# EAGLE board tritiled2x_programmer (EAGLE 8.2.2)
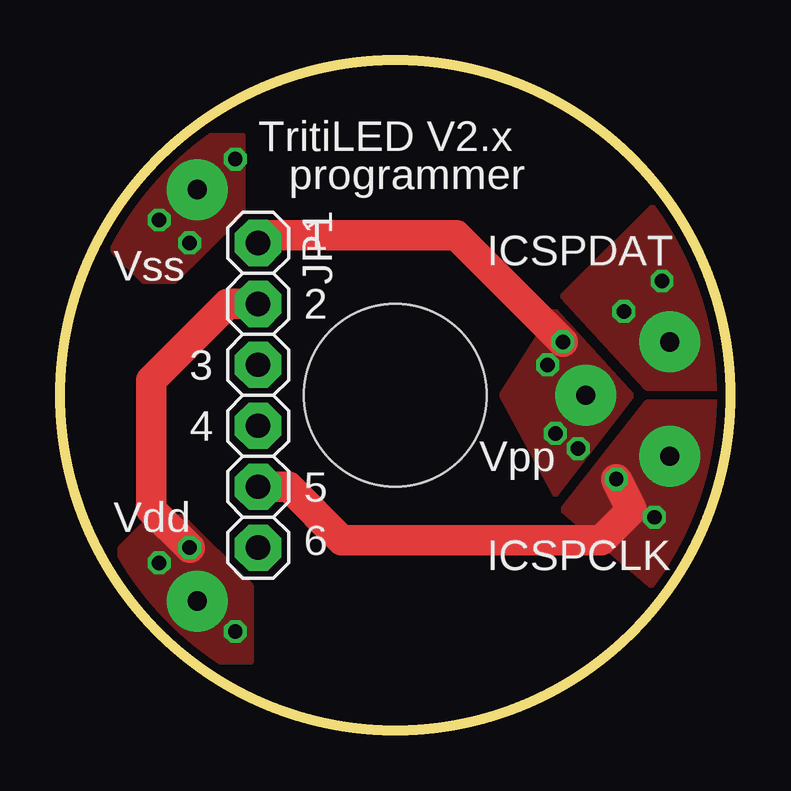
[diagram p0: board, top side]
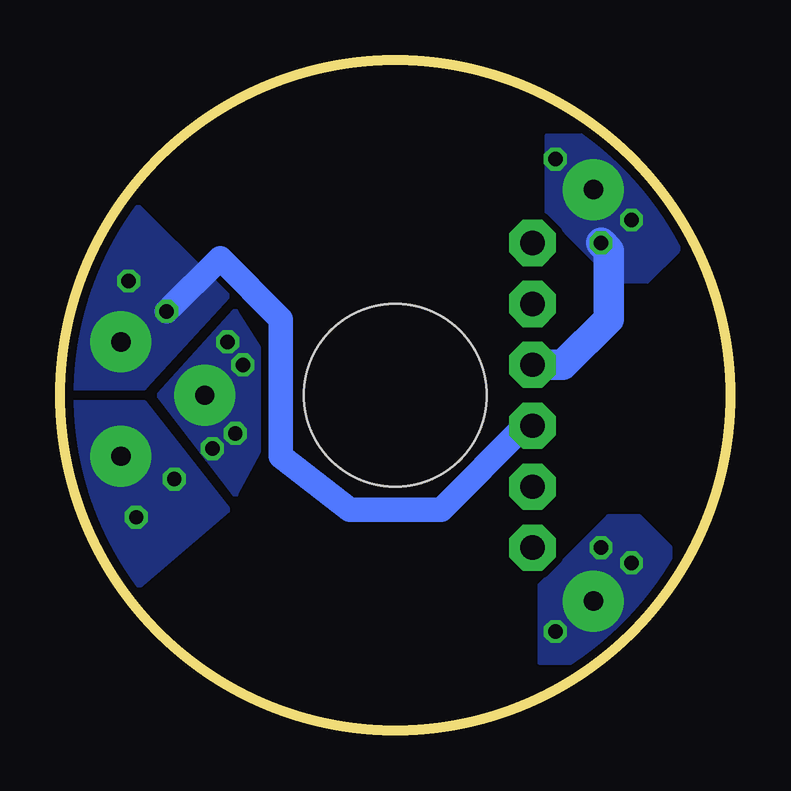
[diagram p1: board, bottom side, seen from below]

Size 27.94 x 27.94 mm. Coordinates in mm from the lower left corner, seen from the top.
Outline: circle at 13.97,13.97 radius 13.97
Copper layers (1*16): Top 0.0356mm / dielectric 1.5011mm / Bottom 0.0356mm
Design rules "LaenPCBOrder_tented_vias_12mil": minimum track width 8mil, minimum drill 13mil, track to track 12mil, track to pad 12mil, pad to pad 12mil, via to via 12mil, smd to smd 12mil, copper to edge 15mil, drill to drill 6mil, minimum pad ring 7mil, minimum via ring 7mil, stop-mask expansion 4mil, vias tented up to drill 28mil, thermal gap 10mil
Holes 7.62 mm at 13.97,13.97

## Footprints (pad centres in the part's own frame; a part is rotated, then mirrored left to right if it is on the bottom)
1X06 = drill 1.016 pad 1.93 octagon: 1 -6.35,0; 2 -3.81,0; 3 -1.27,0; 4 1.27,0; 5 3.81,0; 6 6.35,0
SPRING_PIN = drill 0.8 pad 2.54: P$1 0,0

## Placement (x,y rotation side)
JP1  [1X06]  8.26,13.97 270 top
U$1  SPRING_PIN  [SPRING_PIN]  21.91,13.97 0 top
U$2  SPRING_PIN  [SPRING_PIN]  5.72,5.4 0 top
U$3  SPRING_PIN  [SPRING_PIN]  5.72,22.54 0 top
U$4  SPRING_PIN  [SPRING_PIN]  25.4,16.19 0 top
U$5  SPRING_PIN  [SPRING_PIN]  25.4,11.43 0 top

## Library data of the parts
JP1 = z0
U$1-U$5 = led_temp

## Nets
ICSPCLK: JP1.5 U$5.P$1
ICSPDAT: JP1.4 U$4.P$1
VDD: JP1.2 U$2.P$1
VPP: JP1.1 U$1.P$1
VSS: JP1.3 U$3.P$1

## Tracks (layer width: path | path; a pad name or v marks a point on that pad's centre or on a via)
ICSPCLK  (via drill 0.6)
  Top 1.27: JP1.5 9.53,10.16 11.75,7.94 22.54,7.94 23.81,9.21 v23.18,10.48
  other vias: 24.77,8.89
  pour Top (no thermals): 24.45,13.65 20.96,9.21 25.4,5.4 27.62,8.57 28.26,11.43 28.57,13.65
  pour Bottom (no thermals): 24.45,13.65 20.96,9.21 25.4,5.4 27.62,8.57 28.26,11.43 28.57,13.65
ICSPDAT  (via drill 0.6)
  Bottom 1.016: 8.57,12.7 12.07,9.21 15.88,9.21 18.73,11.43 18.73,17.15 21.27,19.69 v23.5,17.46
  Bottom 1.27: JP1.4 8.57,12.7
  other vias: 25.08,18.73
  pour Bottom (no thermals): 20.96,18.1 24.45,14.29 28.57,14.29 27.62,19.05 25.4,22.54
  pour Top (no thermals): 20.96,18.1 24.45,14.29 28.57,14.29 27.62,19.05 25.4,22.54
VDD  (via drill 0.6)
  Top 1.27: JP1.2 6.99,17.78 3.81,14.61 3.81,9.21 v5.4,7.62
  other vias: 7.3,4.13 4.13,6.99
  pour Top (no thermals): 5.08,8.89 7.94,6.03 7.94,2.86 4.76,2.86 2.54,5.08 2.54,7.62 3.81,8.89
  pour Bottom (no thermals): 5.08,8.89 7.94,6.03 7.94,2.86 4.76,2.86 2.54,5.08 2.54,7.62 3.81,8.89
VPP  (via drill 0.6)
  Top 1.27: JP1.1 8.57,20.64 16.51,20.64 v20.96,16.19
  other vias: 21.59,11.75 20.64,12.38 20.32,15.24
  pour Bottom (no thermals): 20.64,17.46 23.81,13.97 20.64,9.84 18.41,13.97
  pour Top (no thermals): 20.64,17.46 23.81,13.97 20.64,9.84 18.41,13.97
VSS  (via drill 0.6)
  Bottom 1.27: JP1.3 6.99,15.24 5.08,17.15 5.08,20 v5.4,20.32
  other vias: 7.3,23.81 4.13,21.27
  pour Top (no thermals): 6.03,20 7.62,21.59 7.62,24.77 4.45,24.77 2.22,22.54 2.22,20 3.49,18.73 4.76,18.73
  pour Bottom (no thermals): 6.03,20 7.62,21.59 7.62,24.77 4.45,24.77 2.22,22.54 2.22,20 3.49,18.73 4.76,18.73

## Text on the board
tPlace: TritiLED V2.x | programmer | 1 | ICSPDAT | Vss | 2 | 3 | 4 | Vpp | 5 | Vdd | 6 | ICSPCLK